# Altium PCB Super_Hornet.PcbDoc (part 1 of 4)
Units mil, origin at the board's own origin, x right, y up, seen from the top; angles counter-clockwise.
Board outline 6000 x 4000 mil, 2 copper layers (Top Layer, Bottom Layer); 166 components, 85 nets, 398 pads, 0 vias.
Unrouted connection lines stored in the file: 74.
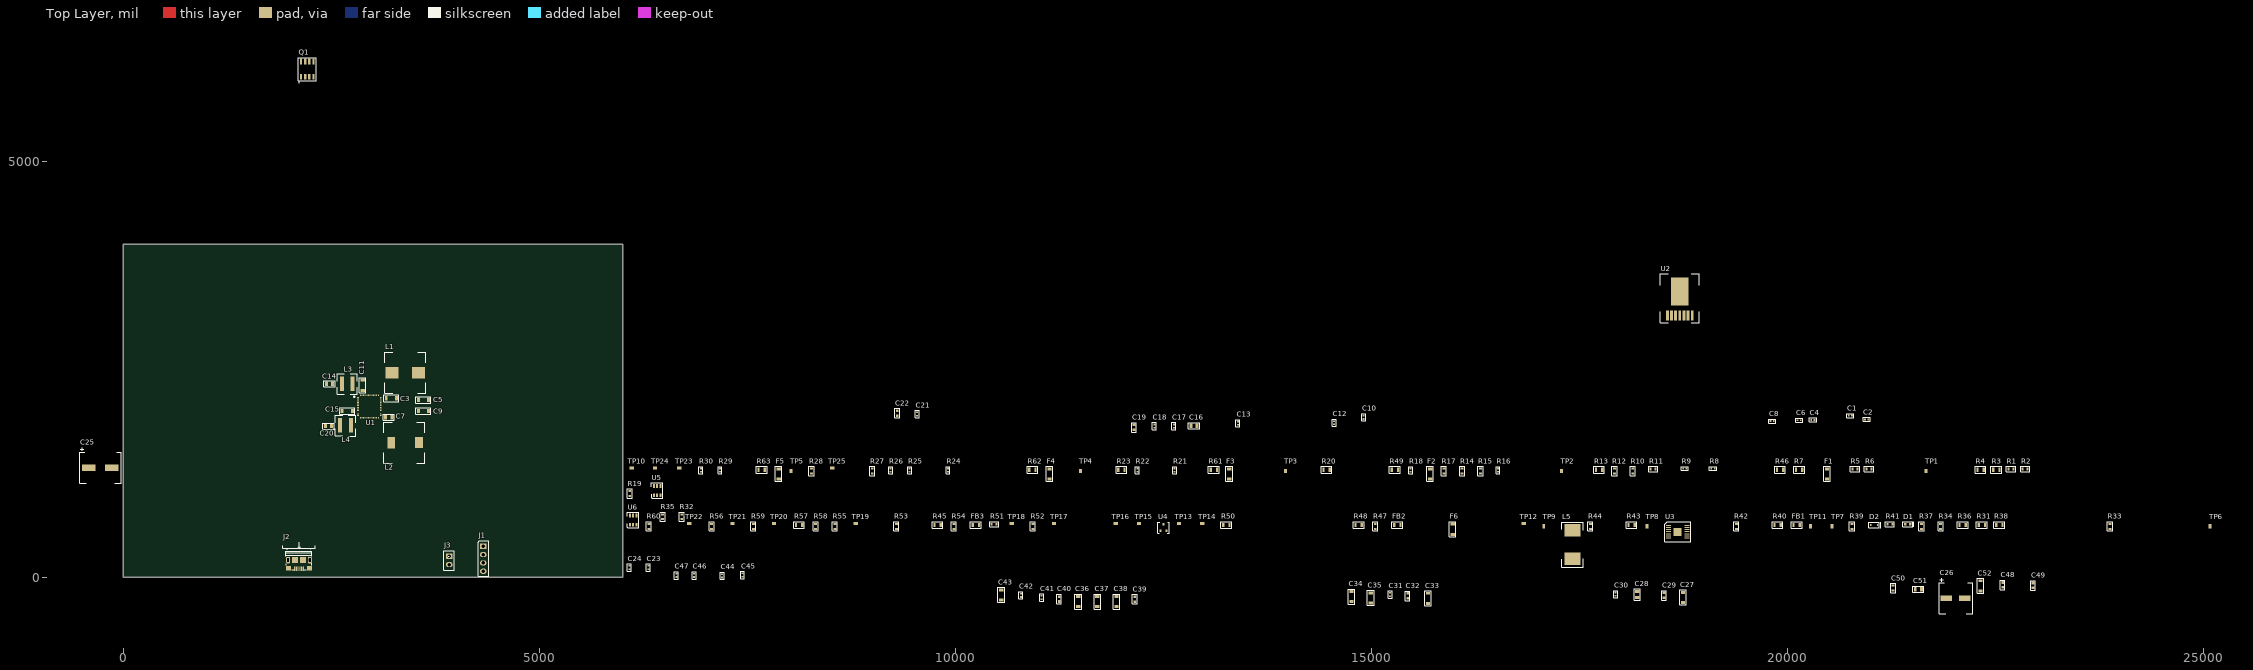
[diagram p0: Top Layer view]
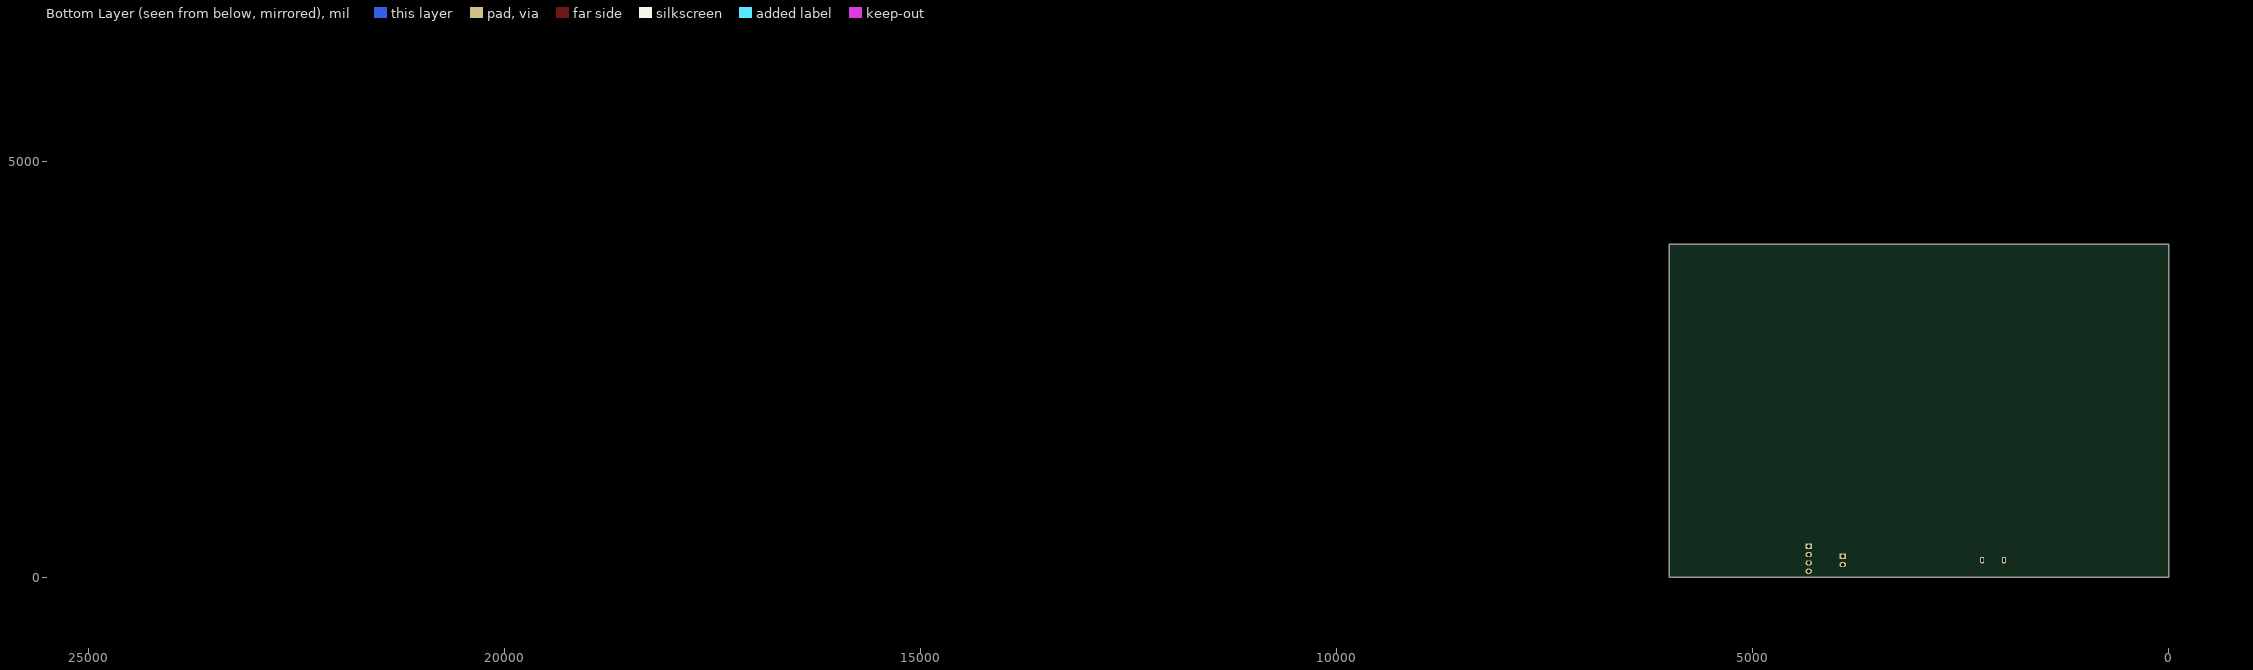
[diagram p1: Bottom Layer view, seen from below]

## Layer stack, top to bottom
Top Solder: solder mask 0.4, Solder Resist, Dk 3.5
Top Layer: signal copper 1.4
Dielectric 1: dielectric 12.6, FR-4, Dk 4.8
Bottom Layer: signal copper 1.4
Bottom Solder: solder mask 0.4, Solder Resist, Dk 3.5

## Board outline
0,0 6000,0 6000,4000 0,4000

## Design rules (kind name [scope] priority, off if disabled: settings)
Clearance [All] p1: gap=3.94 ignorepadtopadclearanceinfootprint=FALSE
PolygonConnect [All] p1: connectstyle=Relief reliefconductorwidth=10 reliefentries=4 polygonreliefangle="90 Angle" airgapwidth=10
RoutingVias [All] p1: holewidth=28 width=50 viastyle="Through Hole" minholewidth=28 minwidth=50 maxholewidth=28 maxwidth=50
SolderMaskExpansion [All] p1: expansion=4
Width [All] p1: maxlimit=10 minlimit=10 preferedwidth=10
30 further rules are at their usual default settings.

## Classes and differential pairs
component class "[02] PMIC_POWER": C1 C2 C3 C4 C5 C6 C7 C8 C9 C10 C11 C12 C13 C14 C15 C16 C17 C18 C19 C20 C21 C22 C23 C24 F1 F2 F3 F4 F5 L1 L2 L3 L4 Q1 R1 R2 R3 R4 R5 R6 R7 R8 R9 R10 R11 R12 R13 R14 R15 R16 R17 R18 R19 R20 R21 R22 R23 R24 R25 R26 R27 R28 R29 R30 R46 R49 R61 R62 R63 TP1 TP2 TP3 TP4 TP5 TP10 TP23 TP24 TP25 U1
component class "[01] SYSTEM_POWER": C25 C26 C27 C28 C29 C30 C31 C32 C33 C34 C35 C36 C37 C38 C39 C40 C41 C42 C43 C44 C45 C46 C47 C48 C49 C50 C51 C52 D1 D2 F6 FB1 FB2 FB3 J1 J2 J3 L5 R31 R32 R33 R34 R35 R36 R37 R38 R39 R40 R41 R42 R43 R44 R45 R47 R48 R50 R51 R52 R53 R54 R55 R56 R57 R58 R59 R60 TP6 TP7 TP8 TP9 TP11 TP12 TP13 TP14 TP15 TP16 TP17 TP18 TP19 TP20 TP21 TP22 U2 U3 U4 U5 U6

## Components (designator, comment, footprint, x,y, rotation, side; value= is the part's Value field where it differs from the comment)
C1 "GCM1555C1H820FA16D" R0402 20755,1940 r0 top
C2 "CC0402KRX7R6BB104" R0402 20950.31,1895 r0 top
C3 "C3216X5R1C106M160AA" C1206 3220,2150 r180 top
C4 "GCM155R71H152KA37D" R0402 20305,1890 r0 top
C5 "12063D226KAT2A" C1206 3605,2130 r0 top
C6 "CC0402KRX7R6BB104" R0402 20139.69,1885 r0 top
C7 "C2012X5R1C475K060AC" C0805_1 3185,1920 r180 top
C8 "GCM155R71H682KA55D" R0402 19815.31,1875 r0 top
C9 "12063D226KAT2A" C1206 3605,1995 r0 top
C10 "GCM155R71H221KA37D" R0402 14905,1920 r90 top
C11 "C3216X5R1C106M160AA" C1206 2875,2305 r270 top
C12 "GCM155R71H152KA37D" R0402 14550,1854.68 r90 top
C13 "CC0402KRX7R6BB104" R0402 13395,1849.68 r90 top
C14 "GRM21BR60J226ME39K" C0805_1 2480,2325 r0 top
C15 "C3216X5R1C106M160AA" C1206 2690,1995 r0 top
C16 "GRM2165C2A182JA01D" C0805_1 12871.34,1820 r0 top
C17 "C0402C101K4GACTU" R0402 12625,1815 r90 top
C18 "CC0402KRX7R6BB104" R0402 12390,1815 r90 top
C19 "C0603C105K8RACTU" C0603_1 12145,1800 r90 top
C20 "GRM21BR60J226ME39K" C0805_1 2460,1815 r180 top
C21 "C0402C181K5RACTU" R0402 9540,1960 r90 top
C22 "C0603C105K8RACTU" C0603_1 9300,1970 r90 top
C23 "CC0402KRX5R5BB105" R0402 6310,115 r90 top
C24 "CC0402KRX5R5BB105" R0402 6080,115 r90 top
C25 "35SVPF39M" "Radial E7" -280,1315 r0 top
C26 "20SVPF120M" "Radial C6" 22020,-255 r0 top
C27 "12063D226KAT2A" C1206 18745,-245 r90 top
C28 "C2012X5R1C475K060AC" C0805_1 18195,-205 r90 top
C29 "GRM188R70J474KA01D" C0603_1 18515,-219.53 r90 top
C30 "CC0402KRX7R6BB104" R0402 17935,-205.32 r90 top
C31 "CC0402KRX7R6BB104" R0402 15225,-210 r90 top
C32 "C0603C105K8RACTU" C0603_1 15435,-225 r90 top
C33 "C3216X5R1C106M160AA" C1206 15680,-255 r90 top
C34 "12063D226KAT2A" C1206 14760,-235 r90 top
C35 "12063D226KAT2A" C1206 14990,-250 r90 top
C36 "C3216X5R1C106M160AA" C1206 11475,-295 r90 top
C37 "C3216X5R1C106M160AA" C1206 11705,-295 r90 top
C38 "C3216X7R1H105K160AE" C1206 11935,-295 r90 top
C39 "GRM188R70J474KA01D" C0603_1 12155,-265 r90 top
C40 "C0603C105K8RACTU" C0603_1 11245,-264.53 r90 top
C41 "CC0402KRX7R6BB104" R0402 11035,-245 r90 top
C42 "CC0402KRX7R6BB104" R0402 10785,-219.69 r90 top
C43 "C3216X5R1C106M160AA" C1206 10550,-215 r90 top
C44 "CC0402KRX7R6BB104" R0402 7195,15.31 r90 top
C45 "CC0402KRX7R6BB104" R0402 7440,25 r90 top
C46 "CC0402KRX7R6BB104" R0402 6860,20.31 r90 top
C47 "CC0402KRX7R6BB104" R0402 6645,20 r90 top
C48 "GRM188R6YA106MA73D" C0603_1 22585,-94.53 r90 top
C49 "GMK107BJ473KAHT" C0603_1 22950,-100.47 r90 top
C50 "C0603C473K8RAC7867" R0603 21270,-130.47 r90 top
C51 "0805YC474KAT2A" C0805_1 21576.54,-145 r0 top
C52 "GRM31CR60J107ME39K" C1206 22320,-105 r90 top
D1 "SML-LXFP0603USBCTR" LED-0603-BLUE 21445,635 r0 top
D2 "MMSZ5231BS-7-F" SOD-323_R1 21040,625 r0 top
F1 "MF-NSML300-2" "C1206 - PTC" 20475,1240 r90 top
F2 "MF-NSML300-2" "C1206 - PTC" 15705,1240 r90 top
F3 "MF-NSML300-2" "C1206 - PTC" 13290,1240 r90 top
F4 "MF-NSML300-2" "C1206 - PTC" 11130,1240 r90 top
F5 "MF-NSML300-2" "C1206 - PTC" 7875,1240 r90 top
F6 "MF-NSML200-2" "C1206 - PTC" 15975,575 r90 top
FB1 "FERRITE BEAD 600 OHM 0805 1LN" R0805 20110,625 r0 top
FB2 "MLZ2012N100LT000" R0805 15310,625 r0 top
FB3 "FERRITE BEAD 600 OHM 0805 1LN" R0805 10245,625 r0 top
J1 "PRPC004SAAN-RC" HDR_MALE_1x4_2.54mm 4325,370 r0 top
J2 "10118193-0001LF" "USB_MICRO - duplicate" 2109.92,152.34 r180 top
J3 "87224-2" HDR_MALE_1x2_2.54mm 3915,250 r0 top
L1 "7443552430" 14.3uH_10_2mmX10_2mmX4mm 3387.48,2455.49 r0 top
L2 "7447798250" 2.5UH_10_2MMX10_2MM 3385,1615 r0 top
L3 "XAL5050-822MEB" 8.2UH_5.28MMX5.28MM 2690,2325 r0 top
L4 "XAL5050-822MEB" 8.2UH_5.28MMX5.28MM 2670.16,1825.49 r0 top
L5 "SPM10040T-2R2M" 2.2UH_10_7MMx10.4MM 17415,390 r90 top
Q1 "IRF8910" 8-SOIC 2210,6105 r0 top
R1 "ERJ-3EKF4641V" R0603 22685,1300 r0 top
R2 "ERJ-3EKF9531V" R0603 22855,1300 r0 top
R3 "CRCW080513K3FKEA" R0805 22510,1290 r0 top
R4 "CRCW080541K2FKEA" R0805 22320,1290 r0 top
R5 "ERJ-3EKF1002V" R0603 20810,1300 r0 top
R6 "ERJ-2GE0R00X" R0603 20980,1300 r0 top
R7 "ERJ-6ENF8251V" R0805 20140,1290 r0 top
R8 "CRCW040222K0FKED" R0402 19105,1305 r0 top
R9 "CRCW040222K0FKED" R0402 18765,1305 r0 top
R10 "ERJ-3EKF4023V" R0603 18140,1275 r90 top
R11 "ERJ-3EKF9531V" R0603 18385,1300 r0 top
R12 "ERJ-3EKF2700V" R0603 17920,1275 r90 top
R13 "RC0805FR-072K87L" R0805 17735,1290 r0 top
R14 "ERJ-3EKF3013V" R0603 16090,1275 r90 top
R15 "ERJ-3EKF1002V" R0603 16310,1275 r90 top
R16 "ERJ-2RKF7322X" R0402 16520,1285 r90 top
R17 "ERJ-3EKF1002V" R0603 15870,1275 r90 top
R18 "ERJ-2RKF1372X" R0402 15470,1285 r90 top
R19 "ERJ-3LWFR010V" R0603 6085,1005 r90 top
R20 "ERJ-6ENF7681V" R0805 14460,1290 r0 top
R21 "ERJ-2RKF3572X" R0402 12635,1285 r90 top
R22 "CRCW040228K7FKED" R0402 12185,1285 r90 top
R23 "ERJ-6ENF8451V" R0805 11995,1290 r0 top
R24 "ERJ-2RKF6812X" R0402 9910,1285 r90 top
R25 "ERJ-2RKF1962X" R0402 9450,1285 r90 top
R26 "CRCW040228K7FKED" R0402 9220,1285 r90 top
R27 "ERJ-2GE0R00X" R0603 9000,1275 r90 top
R28 "ERJ-2GE0R00X" R0603 8270,1275 r90 top
R29 "ERJ-2RKF6042X" R0402 7170,1285 r90 top
R30 "ERJ-2RKF2322X" R0402 6940,1285 r90 top
R31 "ERJ-6GEY0R00V" R0805 22335,625 r0 top
R32 "ERJ-3EKF4222V" R0603 6710,725 r90 top
R33 "ERA-3AEB102V" R0603 23875,610 r90 top
R34 "ERJ3EKF1000V" R0603 21840,610 r90 top
R35 "ERJ-3EKF1272V" R0603 6480,725 r90 top
R36 "ERJ-6ENF1071V" R0805 22105,625 r0 top
R37 "RES 0.005 OHM 1% 1/4W 0603" R0603 21610,610 r90 top
R38 "ERJ-6ENF5621V" R0805 22545,625 r0 top
R39 "ERJ-3EKF2212V" R0603 20775,610 r90 top
R40 "ERJ-6GEY0R00V" R0805 19880,625 r0 top
R41 "ERJ-3EKF1501V" R0603 21230,635 r0 top
R42 "ERJ-3EKF4992V" R0603 19385,610 r90 top
R43 "ERJ-6GEY0R00V" R0805 18125,625 r0 top
R44 "ERJ-3EKF1002V" R0603 17630,610 r90 top
R45 "ERJ-6GEY0R00V" R0805 9785,625 r0 top
R46 "ERJ-6GEY0R00V" R0805 19910,1290 r0 top
R47 "ERJ3EKF1003V" R0603 15045,610 r90 top
R48 "ERJ-6GEY0R00V" R0805 14845,625 r0 top
R49 "ERJ-6GEY0R00V" R0805 15280,1290 r0 top
R50 "ERJ-6GEY0R00V" R0805 13255,625 r0 top
R51 "ERJ-3EKF4992V" R0603 10465,635 r0 top
R52 "ERJ-3EKF1503V" R0603 10930,610 r90 top
R53 "ERJ-3EKF1002V" R0603 9290,610 r90 top
R54 "ERJ-3EKF1002V" R0603 9980,610 r90 top
R55 "ERJ-3EKF6341V" R0603 8550,610 r90 top
R56 "ERJ-3EKF6341V" R0603 7070,610 r90 top
R57 "ERJ-6ENF8251V" R0805 8120,625 r0 top
R58 "ERJ-3EKF9311V" R0603 8320,610 r90 top
R59 "ERJ3EKF1000V" R0603 7570,610 r90 top
R60 "ERJ3EKF1000V" R0603 6315,610 r90 top
R61 "ERJ-6GEY0R00V" R0805 13105,1290 r0 top
R62 "ERJ-6GEY0R00V" R0805 10925,1290 r0 top
R63 "ERJ-6GEY0R00V" R0805 7670,1290 r0 top
TP1 "5017" TEST_POINT 21665,1275 r0 top
TP2 "5017" TEST_POINT 17285,1275 r0 top
TP3 "5017" TEST_POINT 13965,1275 r0 top
TP4 "5017" TEST_POINT 11500,1275 r0 top
TP5 "5017" TEST_POINT 8025,1275 r0 top
TP6 "5017" TEST_POINT 25080,610 r0 top
TP7 "5017" TEST_POINT 20535,610 r0 top
TP8 "5017" TEST_POINT 18310,610 r0 top
TP9 "5017" TEST_POINT 17070,610 r0 top
TP10 "5017" TEST_POINT 6110,1310 r90 top
TP11 "5017" TEST_POINT 20275,610 r0 top
TP12 "5017" TEST_POINT 16830,645 r90 top
TP13 "5017" TEST_POINT 12685,645 r90 top
TP14 "5017" TEST_POINT 12965,645 r90 top
TP15 "5017" TEST_POINT 12205,645 r90 top
TP16 "5017" TEST_POINT 11925,645 r90 top
TP17 "5017" TEST_POINT 11185,645 r90 top
TP18 "5017" TEST_POINT 10675,645 r90 top
TP19 "5017" TEST_POINT 8800,645 r90 top
TP20 "5017" TEST_POINT 7820,645 r90 top
TP21 "5017" TEST_POINT 7320,645 r90 top
TP22 "5017" TEST_POINT 6800,645 r90 top
TP23 "5017" TEST_POINT 6680,1310 r90 top
TP24 "5017" TEST_POINT 6390,1310 r90 top
TP25 "5017" TEST_POINT 8520,1310 r90 top
U1 "ADP5052" 48-LFSCP 2955,2050 r0 top
U2 "LMZ22005TZX/NOPB" TO-PMOD-7 18705,3290 r0 top
U3 "TPS54325PWPR" 14-HTSSOP 17735,575 r0 top
U4 "REF3012AIDBZR" SOT-23-3 12500,595 r0 top
U5 "INA199A1DCKR" SOT-363 6415,1040.12 r0 top
U6 "INA199A1DCKR" SOT-363 6125,685 r0 top

## Footprints (in the part's own frame and the unit in brackets; to place one, negate y for a bottom-side part, rotate by r counter-clockwise, add the part's x,y. Pads: shape width x height; smd on the part's side, far side on the other; paste and mask are expansions set on the pad)
2.2UH_10_7MMx10.4MM [mm]
  rect 3.8x4.8 smd: 1(-4.35,0) 2(4.35,0)
  silkscreen extent -6.85,-3.24 6.9,3.3, body extent -3.6,-3.2 3.6,3.2, height 3.01
2.5UH_10_2MMX10_2MM [mm]
  rect 2.4x3.4 smd: 1(-4.2,-0.012) 2(4.2,0.012)
  silkscreen extent -6.45,-6.25 6.05,6.25, body extent -5.1,-5.1 5.1,5.1, height 6.35
8-SOIC [mm]
  rect 0.72x1.78 smd: 1(-1.905,-2.34) 2(-0.635,-2.332) 3(0.635,-2.332) 4(1.905,-2.332) 5(1.905,2.34) 6(0.635,2.34) 7(-0.635,2.34) 8(-1.905,2.34)
  silkscreen extent -2.75,-4.1 2.75,3.5, body extent -2.45,-3 2.45,3, height 1.75
8.2UH_5.28MMX5.28MM [mm]
  rect 1.18x4.47 smd: 1(-1.655,-0.012) 2(1.655,0.013)
  silkscreen extent -3.13,-3.3 3.08,3, body extent -2.74,-2.99 2.74,2.69, height 3.11
14-HTSSOP [mm]
  rect 1.55x0.25 smd: 1(21.2,1.2) 2(21.2,0.55) 3(21.2,-0.1) 4(21.2,-0.75) 5(21.2,-1.4) 6(21.2,-2.05) 7(21.2,-2.7) 8(26.8,-2.7) 9(26.8,-2.05) 10(26.8,-1.4) 11(26.8,-0.75) 12(26.8,-0.1) 13(26.8,0.55) 14(26.8,1.2)
  rect 2.31x2.46 smd: 15(23.95,-0.8)
  silkscreen extent 20,-3.75 28,2.25, body extent 20.7,-3.3 27.3,1.8, height 1.7
14.3uH_10_2mmX10_2mmX4mm [mm]
  rect 4x3.5 smd: 1(-4,-0.012) 2(4,0.013)
  silkscreen extent -6.25,-6.25 6.25,6.25, body extent -5.25,-5.1 5.25,5.1, height 4
48-LFSCP [mm]
  rect 0.5x0.3 smd: 1(-3.45,2.75) 2(-3.45,2.25) 3(-3.45,1.75) 4(-3.45,1.25) 5(-3.45,0.75) 6(-3.45,0.25) 7(-3.45,-0.25) 8(-3.45,-0.75) 9(-3.45,-1.25) 10(-3.45,-1.75) 11(-3.45,-2.25) 12(-3.45,-2.75) 25(3.475,-2.75) 26(3.475,-2.25) 27(3.475,-1.75) 28(3.475,-1.25) 29(3.475,-0.75) 30(3.475,-0.25) 31(3.475,0.25) 32(3.475,0.75) 33(3.475,1.25) 34(3.475,1.75) 35(3.475,2.25) 36(3.475,2.75)
  rect 0.3x0.5 smd: 13(-2.75,-3.45) 14(-2.25,-3.45) 15(-1.75,-3.45) 16(-1.25,-3.45) 17(-0.75,-3.45) 18(-0.25,-3.45) 19(0.25,-3.45) 20(0.75,-3.45) 21(1.25,-3.45) 22(1.75,-3.45) 23(2.25,-3.45) 24(2.75,-3.45) 37(2.75,3.425) 38(2.25,3.425) 39(1.75,3.425) 40(1.25,3.425) 41(0.75,3.425) 42(0.25,3.425) 43(-0.25,3.425) 44(-0.75,3.425) 45(-1.25,3.425) 46(-1.75,3.425) 47(-2.25,3.425) 48(-2.75,3.425)
  silkscreen extent -4.81,2.76 -4.43,3.14, body extent -3.55,-3.55 3.55,3.55, height 0.78
C0603_1 [mm]
  rect 0.8x0.8 smd: 1(-0.75,0) 2(0.75,0)
  silkscreen extent -1.45,-0.7 1.45,0.7, body extent -0.8,-0.4 0.8,0.44, height 0.81
C0805_1 [mm]
  rect 0.9x1.3 smd: 1(-1.05,0) 2(0.85,0)
  silkscreen extent -1.8,-0.9 1.6,0.9, body extent -1.1,-0.6 0.9,0.6, height 0.71
C1206 [mm]
  rect 0.9x1.3 smd: 1(-1.55,0) 2(1.55,0)
  silkscreen extent -2.29,-1.02 2.29,1.02, body extent -1.6,-0.8 1.6,0.8, height 1
"C1206 - PTC" [mm]
  rect 0.9x1.3 smd: 1(-1.55,0) 2(1.55,0)
  silkscreen extent -2.29,-1.02 2.29,1.02, body extent -1.7,-0.85 1.7,0.85, height 0.81
HDR_MALE_1x2_2.54mm [mm]
  rect 2x1.6 hole 1.1: 1(0,0)
  oval 2x1.6 hole 1.1: 2(0,-2.54)
  silkscreen extent -1.6,-4.2 1.6,1.7, body extent -1.27,-3.81 1.27,1.27, height 8.89
HDR_MALE_1x4_2.54mm [mm]
  rect 2x1.6 hole 1.1: 1(0,0)
  oval 2x1.6 hole 1.1: 2(0,-2.54) 3(0,-5.08) 4(0,-7.62)
  silkscreen extent -1.6,-9.2 1.7,1.7, body extent -1.2,-8.88 1.34,1.28, height 5.6
LED-0603-BLUE [mm]
  rect 0.75x0.7 smd: 1(-0.75,0) 2(0.75,0)
  silkscreen extent -1.5,-0.7 1.9,0.7, body extent -0.8,-0.4 0.8,0.4, height 0.6
R0402 [mm]
  rect 0.5x0.6 smd: 1(-0.5,0) 2(0.5,0)
  silkscreen extent -1.1,-0.6 1.1,0.6, body extent -0.5,-0.25 0.5,0.25, height 0.36
R0603 [mm]
  rect 0.6x0.9 smd: 1(-0.75,0) 2(0.75,0)
  silkscreen extent -1.4,-0.79 1.4,0.79, body extent -0.77,-0.41 0.83,0.43, height 0.81
R0805 [mm]
  rect 0.7x1.3 smd: 1(-0.95,0) 2(0.95,0)
  silkscreen extent -1.65,-1.02 1.65,1.02, body extent -1,-0.6 1,0.6, height 0.71
"Radial C6" [mm]
  rect 3.5x1.6 smd: 1(-2.812,0) 2(2.813,0)
  silkscreen extent -5.04,-4.75 5.21,6.1, body extent -3.75,-3.4 3.75,3.4, height 6.05
"Radial E7" [mm]
  rect 4.15x2 smd: 1(-3.525,0) 2(3.525,0)
  silkscreen extent -6.25,-4.75 6.5,6.1, body extent -4.6,-4.25 4.6,4.25, height 7.06
SOD-323_R1 [mm]
  rect 0.45x0.6 smd: 1(-1.05,0) 2(1.05,0)
  silkscreen extent -1.6,-0.9 2,0.92, body extent -1.35,-0.68 1.25,0.67, height 1.12
SOT-23-3 [mm]
  rect 0.6x0.7 smd: 1(-0.95,-1) 2(0.95,-1) 3(0,1)
  silkscreen extent -1.8,-1.8 1.8,1.7, body extent -1.5,-1.25 1.5,1.25, height 1.11
SOT-363 [mm]
  rect 0.6x1.1 smd: 1(-1,-1.4) 2(0,-1.4) 3(1,-1.4) 4(-1,1.4) 5(0,1.4) 6(1,1.4)
  silkscreen extent -1.78,-2.4 1.75,2.35, body extent -1.5,-1.5 1.5,1.5, height 1.31
TEST_POINT [mm]
  rect 0.9x1.3 smd: 1(0,0)
  body extent -0.5,-1.45 0.5,1.45, height 2.01
TO-PMOD-7 [mm]
  rect 0.89x3.06 smd: 1(-3.81,-3.652) 2(-2.54,-3.652) 3(-1.27,-3.652) 4(0,-3.652) 5(1.27,-3.652) 6(2.54,-3.652) 7(3.81,-3.652)
  rect 5.35x8.54 smd: 8(0,3.652)
  silkscreen extent -6,-6 6,9, body extent -5.22,-3.56 5.2,8.4, height 4.74
"USB_MICRO - duplicate" [mm]
  rect 0.4x1.35 smd mask+0.05: 1(-1.3,1.338) 2(-0.65,1.338) 3(0,1.338) 4(0.65,1.338) 5(1.3,1.338)
  rect 1.6x1.4 smd mask+0.05: 6(-3.2,1.112)
  rect 1.6x1.4 smd paste+0 mask+0.05: 7(3.2,1.112)
  rrect50% 1.2x2 hole 0.5 slot 1.2 at 90 deg: 8(-3.3,-1.338) 9(3.3,-1.338)
  rect 1.9x1.9 smd mask+0.05: 10(-1.2,-1.338) 11(1.2,-1.338)
  silkscreen extent -5.03,-6.83 5.03,1.64, body extent -3.93,-4.06 3.93,1.6, height 2.87

## Part data
C1: "CAP CER 82PF 50V C0G/NP0 0402", Capacitance=82pF, Manufacturer=Murata, Operating Temperature="-55°C ~ 125°C", Package / Case="0402 (1005 Metric)", Ratings=AEC-Q200, Supplier Part Number 1=490-16436-1-ND, Temperature Coefficient="C0G, NP0", Tolerance=±1%, Voltage - Rated=50V, Applications=Automotive, Categories=Capacitors, ComponentLink1Description=http://search.murata.co.jp/Ceramy/image/img/A01X/G101/ENG/GCM1555C1H820FA16-01.pdf?src-supplier=Digi-Key, ComponentLink1URL=http://search.murata.co.jp/Ceramy/image/img/A01X/G101/ENG/GCM1555C1H820FA16-01.pdf?src-supplier=Digi-Key, Failure Rate=-, Features=-, Height - Seated (Max)=-, Lead Spacing=-, Lead Style=-, Manufacturer Part Number=GCM1555C1H820FA16D, Mounting Type="Surface Mount, MLCC", Packaging=Digi-Reel®, Part Status=Active, Pricing 1="1=0.13, 10=0.095, 100=0.0445, 500=0.0312, 1000=0.0258, 2500=0.024, 5000=0.022 (USD)", Series=GCM, Size / Dimension="0.039 L x 0.020 W (1.00mm x 0.50mm)", Stock 1=81409, Supplier 1=Digi-Key, Thickness (Max)="0.022 (0.55mm)"
C2 C6 C13 C18 C30 C31 C41: "0402 0.1 uF 10 V ±10 % Tolerance X7R SMT Multilayer Ceramic Capacitor", Capacitance=0.1µF, Manufacturer=Yageo, Operating Temperature="-55°C ~ 125°C", Package / Case="0402 (1005 Metric)", Ratings=-, Standard Package=1, Supplier Part Number 1=311-1345-1-ND, Temperature Coefficient=X7R, Tolerance=±10%, Voltage - Rated=10V, Applications="General Purpose", Catalog Drawings=CC_0402, Category=Capacitors, ComponentLink1Description=http://www.mouser.com/ds/2/447/Yageo_UPY-GP_NP0_16V-to-50V_9-358835.pdf?src-supplier=Mouser, ComponentLink1URL=http://www.mouser.com/ds/2/447/Yageo_UPY-GP_NP0_16V-to-50V_9-358835.pdf?src-supplier=Mouser, ComponentLink2Description=https://www.verical.com/server-webapp/html/getDatasheet?partID=317655&src-supplier=Verical, ComponentLink2URL=https://www.verical.com/server-webapp/html/getDatasheet?partID=317655&src-supplier=Verical, ComponentLink3Description=http://www.farnell.com/datasheets/2167236.pdf?src-supplier=Element14, ComponentLink3URL=http://www.farnell.com/datasheets/2167236.pdf?src-supplier=Element14, ComponentLink4Description=http://www.yageo.com/documents/recent/UPY-GPHC_X7R_6.3V-to-50V_18.pdf?src-supplier=Digi-Key, ComponentLink4URL=http://www.yageo.com/documents/recent/UPY-GPHC_X7R_6.3V-to-50V_18.pdf?src-supplier=Digi-Key, ComponentLink5Description=http://www.yageo.com/documents/recent/UPY-GPHC_X7R_6.3V-to-50V_8.pdf?src-supplier=Avnet+Europe, ComponentLink5URL=http://www.yageo.com/documents/recent/UPY-GPHC_X7R_6.3V-to-50V_8.pdf?src-supplier=Avnet+Europe, Family="Ceramic Capacitors", Featured Product="Commodity Multilayer Ceramic Capacitors – CC Series", Features=-, Height - Seated (Max)=-, Lead Spacing=-, Lead Style=-, Manufacturer Part Number=CC0402KRX7R6BB104, Mounting Type="Surface Mount, MLCC", Online Catalog="CC Series", Other Names=311-1345-6, Packaging=Digi-Reel®, Pricing 1="1=0.1, 10=0.03, 100=0.0134, 500=0.0096, 1000=0.0075, 2500=0.0069, 5000=0.0063 (USD)", Product Training Modules="Multilayer Ceramic Capacitors", Series=CC, Size / Dimension="0.039\" L x 0.020\" W (1.00mm x 0.50mm)", Stock 1=1324566, Supplier 1=Digi-Key, Thickness (Max)="0.022\" (0.55mm)"
C3 C11 C15 C33 C36 C37 C43: "CAP CER 10UF 16V X5R 1206", Capacitance=10µF, Manufacturer=TDK, Operating Temperature="-55°C ~ 85°C", Package / Case="1206 (3216 Metric)", PCN Part Number="MLCC Part Number Change 30/Nov/2012", Ratings=-, Standard Package=1, Supplier Part Number 1=445-1426-1-ND, Temperature Coefficient=X5R, Tolerance=±20%, Voltage - Rated=16V, Applications="General Purpose", Catalog Drawings="C SERIES_1206_1.8", Category=Capacitors, ComponentLink1Description=http://www.farnell.com/datasheets/1359284.pdf?src-supplier=Element14, ComponentLink1URL=http://www.farnell.com/datasheets/1359284.pdf?src-supplier=Element14, ComponentLink2Description=http://www.mouser.com/ds/2/400/lcc_commercial_general_en-837201.pdf?src-supplier=Mouser, ComponentLink2URL=http://www.mouser.com/ds/2/400/lcc_commercial_general_en-837201.pdf?src-supplier=Mouser, ComponentLink3Description=http://www.farnell.com/datasheets/1796654.pdf?src-supplier=Element14, ComponentLink3URL=http://www.farnell.com/datasheets/1796654.pdf?src-supplier=Element14, ComponentLink4Description=https://product.tdk.com/info/en/documents/chara_sheet/C3216X5R1C106M160AA.pdf?src-supplier=Digi-Key, ComponentLink4URL=https://product.tdk.com/info/en/documents/chara_sheet/C3216X5R1C106M160AA.pdf?src-supplier=Digi-Key, Family="Ceramic Capacitors", Features=-, Height - Seated (Max)=-, Lead Spacing=-, Lead Style=-, Manufacturer Part Number=C3216X5R1C106M160AA, Mounting Type="Surface Mount, MLCC", Online Catalog="C Series, General Purpose", Other Names=445-1426-6, Packaging=Digi-Reel®, Pricing 1="1=0.33, 10=0.228, 100=0.129, 500=0.0911, 1000=0.0797 (USD)", Product Training Modules="High Capacitance Replacement C Series General Applications SEAT, CCV, and TVCL Design Tools Guide to Replacing an Electrolytic Capacitor with an MLCC", RoHS Information="RoHS Certificate-MLCC", Series=C, Size / Dimension="0.126\" L x 0.063\" W (3.20mm x 1.60mm)", Stock 1=163411, Supplier 1=Digi-Key, Thickness (Max)="0.071\" (1.80mm)"
C4 C12: "CAP CER 1500PF 50V X7R 0402", Capacitance=1500pF, Manufacturer=Murata, Operating Temperature="-55°C ~ 125°C", Package / Case="0402 (1005 Metric)", Ratings=AEC-Q200, Standard Package=1, Supplier Part Number 1=490-8000-1-ND, Temperature Coefficient=X7R, Tolerance=±10%, Voltage - Rated=50V, Applications=Automotive, Catalog Drawings="GCM Series_0402", Category=Capacitors, ComponentLink1Description=http://psearch.murata.com/capacitor/product/GCM155R71H152KA37%23.pdf?src-supplier=Avnet+Europe, ComponentLink1URL=http://psearch.murata.com/capacitor/product/GCM155R71H152KA37%23.pdf?src-supplier=Avnet+Europe, ComponentLink2Description=http://www.murata.com/~/media/webrenewal/support/library/catalog/products/capacitor/mlcc/c03e.ashx?src-supplier=Digi-Key, ComponentLink2URL=http://www.murata.com/~/media/webrenewal/support/library/catalog/products/capacitor/mlcc/c03e.ashx?src-supplier=Digi-Key, ComponentLink3Description=http://psearch.murata.com/capacitor/product/GCM155R71H152KA37%23.pdf?src-supplier=Avnet, ComponentLink3URL=http://psearch.murata.com/capacitor/product/GCM155R71H152KA37%23.pdf?src-supplier=Avnet, ComponentLink4Description=http://search.murata.co.jp/Ceramy/image/img/A01X/partnumbering_e_02.pdf?src-supplier=Digi-Key, ComponentLink4URL=http://search.murata.co.jp/Ceramy/image/img/A01X/partnumbering_e_02.pdf?src-supplier=Digi-Key, ComponentLink5Description=http://search.murata.co.jp/Ceramy/image/img/w_hinm/S0717E.pdf?src-supplier=Future+Electronics, ComponentLink5URL=http://search.murata.co.jp/Ceramy/image/img/w_hinm/S0717E.pdf?src-supplier=Future+Electronics, ComponentLink6Description=https://www.verical.com/server-webapp/html/getDatasheet?partID=724076&src-supplier=Verical, ComponentLink6URL=https://www.verical.com/server-webapp/html/getDatasheet?partID=724076&src-supplier=Verical, Dynamic Catalog="GCM Series", Family="Ceramic Capacitors", Featured Product="GCM Series Capacitors", Features=-, Height - Seated (Max)=-, Lead Spacing=-, Lead Style=-, Manufacturer Part Number=GCM155R71H152KA37D, Mounting Type="Surface Mount, MLCC", Other Names=490-8000-6, Packaging=Digi-Reel®, Pricing 1="1=0.1, 10=0.045, 100=0.0202, 500=0.0144, 1000=0.0113, 2500=0.0103, 5000=0.0095 (USD)", Series=GCM, Size / Dimension="0.039\" L x 0.020\" W (1.00mm x 0.50mm)", Stock 1=36934, Supplier 1=Digi-Key, Thickness (Max)="0.022\" (0.55mm)"
C5 C9: "1206 25 V 22 uF X5R ±10% Tolerance SMT Multilayer Ceramic Capacitor", Capacitance="22 µF", Case Size/Dimension=1206, Dielectric=X5R, Manufacturer="Kyocera AVX", Rated Voltage="25 V", Supplier Part Number 1=478-9946-1-ND, Tolerance (%)="±10 %", ComponentLink1Description=http://www.avx.com/docs/Catalogs/cx5r.pdf?src-supplier=Future+Electronics, ComponentLink1URL=http://www.avx.com/docs/Catalogs/cx5r.pdf?src-supplier=Future+Electronics, Manufacturer Part Number=12063D226KAT2A, Pricing 1="1=1.15, 10=0.909, 100=0.6814, 500=0.5148, 1000=0.4543 (USD)", Stock 1=100747, Supplier 1=Digi-Key
C7 C28: "CAP CER 4.7UF 16V X5R 0805", Capacitance=4.7µF, Manufacturer=TDK, Operating Temperature="-55°C ~ 85°C", Package / Case="0805 (2012 Metric)", Standard Package=1, Supplier Part Number 1=445-14381-1-ND, Temperature Coefficient=X5R, Tolerance=±10%, Voltage - Rated=16V, Applications="General Purpose", Category=Capacitors, ComponentLink1Description=https://product.tdk.com/en/products/common/pdf/mlcc_partnumber_description.pdf?src-supplier=Digi-Key, ComponentLink1URL=https://product.tdk.com/en/products/common/pdf/mlcc_partnumber_description.pdf?src-supplier=Digi-Key, ComponentLink2Description=https://product.tdk.com/info/en/catalog/spec/mlccspec_commercial_general_midvoltage_en.pdf?src-supplier=Digi-Key, ComponentLink2URL=https://product.tdk.com/info/en/catalog/spec/mlccspec_commercial_general_midvoltage_en.pdf?src-supplier=Digi-Key, EDA / CAD Models="Download from Accelerated Designs", Family="Ceramic Capacitors", Manufacturer Part Number=C2012X5R1C475K060AC, Mounting Type="Surface Mount, MLCC", Online Catalog="C Series, General Purpose", Other Names=445-14381-6, Packaging=Digi-Reel®, Pricing 1="1=0.5, 10=0.348, 100=0.2087, 500=0.1565, 1000=0.1322 (USD)", Product Training Modules="C Series General Applications SEAT, CCV, and TVCL Design Tools Guide to Replacing an Electrolytic Capacitor with an MLCC", RoHS Information="RoHS Certificate-MLCC", Series=C, Size / Dimension="0.079\" L x 0.049\" W (2.00mm x 1.25mm)", Stock 1=30385, Supplier 1=Digi-Key, Thickness (Max)="0.030\" (0.75mm)"
C8: "CAP CER 6800PF 50V X7R 0402", Capacitance Value="0.0068 uF", Dielectric=X7R, Manufacturer=Murata, Operating Temperature="-55 to 125 °C", Package/Case=0402, Supplier Part Number 1=490-11152-1-ND, Tolerance="10 %", Voltage="50 Vdc", Category="Capacitor Ceramic Multilayer", ComponentLink1Description=http://search.murata.co.jp/Ceramy/image/img/w_hinm/S0717E.pdf?src-supplier=Digi-Key, ComponentLink1URL=http://search.murata.co.jp/Ceramy/image/img/w_hinm/S0717E.pdf?src-supplier=Digi-Key, Construction=Flat, Manufacturer Part Number=GCM155R71H682KA55D, Mounting="Surface Mount", Packaging="Tape & Reel", Pricing 1="1=0.1, 10=0.05, 100=0.0221, 500=0.0158, 1000=0.0124, 2500=0.0113, 5000=0.0104 (USD)", Product Depth="0.5 mm", Product Height="0.5 mm", Product Length="1 mm", Rad Hard=No, Stock 1=79110, Supplier 1=Digi-Key
C10: "CAP CER 220PF 50V X7R 0402", Capacitance Value="220 pF", Dielectric=X7R, Manufacturer=Murata, Operating Temperature="-55 to 125 °C", Package/Case=0402, Supplier Part Number 1=490-4912-1-ND, Tolerance="10 %", Voltage="50 Vdc", Category="Capacitor Ceramic Multilayer", ComponentLink1Description=http://psearch.murata.com/capacitor/product/GCM155R71H221KA37%23.pdf?src-supplier=Avnet+Europe, ComponentLink1URL=http://psearch.murata.com/capacitor/product/GCM155R71H221KA37%23.pdf?src-supplier=Avnet+Europe, ComponentLink2Description=http://search.murata.co.jp/Ceramy/image/img/A01X/partnumbering_e_02.pdf?src-supplier=Digi-Key, ComponentLink2URL=http://search.murata.co.jp/Ceramy/image/img/A01X/partnumbering_e_02.pdf?src-supplier=Digi-Key, ComponentLink3Description=https://www.murata.com/~/media/webrenewal/support/library/catalog/products/capacitor/mlcc/c03e.ashx?src-supplier=Avnet, ComponentLink3URL=https://www.murata.com/~/media/webrenewal/support/library/catalog/products/capacitor/mlcc/c03e.ashx?src-supplier=Avnet, Construction=Flat, Manufacturer Part Number=GCM155R71H221KA37D, Mounting="Surface Mount", Packaging="Tape & Reel", Pricing 1="1=0.1, 10=0.054, 100=0.0241, 500=0.0172, 1000=0.0135, 2500=0.0123, 5000=0.0113 (USD)", Product Depth="0.5 mm", Product Height="0.5 mm", Product Length="1 mm", Rad Hard=No, Stock 1=139362, Supplier 1=Digi-Key
C14 C20: "Cap Ceramic 22uF 6.3V X5R 20% SMD 0805 85C Embossed T/R", Capacitance Value="22 uF", Dielectric=X5R, Manufacturer=Murata, Operating Temperature="-55 to 85 °C", Package/Case=0805, Supplier Part Number 1=490-6471-1-ND, Tolerance="20 %", Voltage="6.3 Vdc", Category="Capacitor Ceramic Multilayer", ComponentLink1Description=http://search.murata.co.jp/Ceramy/image/img/A01X/G101/ENG/GRM21BR60J226ME39-01.pdf?src-supplier=Digi-Key, ComponentLink1URL=http://search.murata.co.jp/Ceramy/image/img/A01X/G101/ENG/GRM21BR60J226ME39-01.pdf?src-supplier=Digi-Key, ComponentLink2Description=http://www.mouser.com/ds/2/281/c02e-2905.pdf?src-supplier=Mouser, ComponentLink2URL=http://www.mouser.com/ds/2/281/c02e-2905.pdf?src-supplier=Mouser, ComponentLink3Description=http://psearch.murata.com/capacitor/product/GRM21BR60J226ME39%23.pdf?src-supplier=Avnet, ComponentLink3URL=http://psearch.murata.com/capacitor/product/GRM21BR60J226ME39%23.pdf?src-supplier=Avnet, Construction=Flat, Manufacturer Part Number=GRM21BR60J226ME39K, Mounting="Surface Mount", Packaging="Tape & Reel", Pricing 1="1=0.5, 10=0.347, 100=0.2082, 500=0.1561, 1000=0.1319, 2500=0.1249, 5000=0.118 (USD)", Product Depth="1.25 mm", Product Height="1.25 mm", Product Length="2 mm", Rad Hard=No, Stock 1=32530, Supplier 1=Digi-Key
C16: "CAP CER 1800PF 100V C0G/NP0 0805", Capacitance=1800pF, Manufacturer=Murata, Operating Temperature="-55°C ~ 125°C", Package / Case="0805 (2012 Metric)", Ratings=-, Standard Package=4,000, Supplier Part Number 1=490-13368-1-ND, Temperature Coefficient="C0G, NP0", Tolerance=±5%, Voltage - Rated=100V, Applications="General Purpose", Catalog Drawings="GRM Series_0805_0.6", Category=Capacitors, ComponentLink1Description=http://search.murata.co.jp/Ceramy/image/img/A01X/partnumbering_e_01.pdf?src-supplier=Digi-Key, ComponentLink1URL=http://search.murata.co.jp/Ceramy/image/img/A01X/partnumbering_e_01.pdf?src-supplier=Digi-Key, ComponentLink2Description=http://psearch.murata.com/capacitor/product/GRM2165C2A182JA01%23.pdf?src-supplier=Avnet, ComponentLink2URL=http://psearch.murata.com/capacitor/product/GRM2165C2A182JA01%23.pdf?src-supplier=Avnet, ComponentLink3Description=http://www.mouser.com/ds/2/281/c02e-2905.pdf?src-supplier=Mouser, ComponentLink3URL=http://www.mouser.com/ds/2/281/c02e-2905.pdf?src-supplier=Mouser, Family="Ceramic Capacitors", Features=-, Height - Seated (Max)=-, Lead Spacing=-, Lead Style=-, Manufacturer Part Number=GRM2165C2A182JA01D, Mounting Type="Surface Mount, MLCC", Packaging="Tape & Reel (TR)", Pricing 1="1=0.19, 10=0.128, 100=0.0649, 500=0.0444, 1000=0.0393 (USD)", Series=GRM, Size / Dimension="0.079\" L x 0.049\" W (2.00mm x 1.25mm)", Stock 1=2422, Supplier 1=Digi-Key, Thickness (Max)="0.028\" (0.70mm)"
C17: "CAP CER 100PF 16V C0G/NP0 0402", Capacitance="100 pF", Capacitance - nF="0.1 nF", Case Code - in=0402, Case Code - mm=1005, Case Height="0.5 mm", Case Length="1 mm", Dielectric="C0G (NP0)", Manufacturer=KEMET, Maximum Operating Temperature="+ 125 C", Minimum Operating Temperature="- 55 C", Operating Temperature Range="- 55 C to + 125 C", Package / Case="0402 (1005 metric)", Supplier Part Number 1=399-7749-1-ND, Temperature Coefficient / Code="+/- 30 PPM / C", Tolerance="10 %", Voltage Rating="16 V", Brand=Kemet, Case Width="0.5 mm", Class="Class 1", ComponentLink1Description=http://www.mouser.com/ds/2/212/KEM_C1003_C0G_SMD-1101588.pdf?src-supplier=Mouser, ComponentLink1URL=http://www.mouser.com/ds/2/212/KEM_C1003_C0G_SMD-1101588.pdf?src-supplier=Mouser, Dimensions="0.5 mm W x 1 mm L x 0.5 mm H", Dissipation Factor DF=0.1, Factory Pack Quantity=10000, Lead Spacing="0.3 mm", Manufacturer Part Number=C0402C101K4GACTU, Packaging=Reel, Part # Aliases=C0402C101K4GAC7867, Pricing 1="1=0.1, 10=0.025, 100=0.0112, 500=0.008, 1000=0.0063, 2500=0.0057, 5000=0.0052 (USD)", Product="General Type MLCCs", Product Category="Multilayer Ceramic Capacitors MLCC - SMD/SMT", RoHS=Details, Series=C0402C, Stock 1=105221, Supplier 1=Digi-Key, Termination Style=SMD/SMT, Type="SMD MLCC C0G 10 - 250 VDC Commercial Grade", Voltage Rating DC="16 V"
C19 C22 C32 C40: "CAP CER 1UF 10V X7R 0603", Capacitance="1 uF", Capacitance - nF="1000 nF", Case Code - in=0603, Case Code - mm=1608, Case Height="0.8 mm", Case Length="1.6 mm", Dielectric=X7R, Manufacturer=KEMET, Maximum Operating Temperature="+ 125 C", Minimum Operating Temperature="- 55 C", Operating Temperature Range="- 55 C to + 125 C", Package / Case="0603 (1608 metric)", Supplier Part Number 1=399-11133-1-ND, Temperature Coefficient / Code="+/- 15 %", Tolerance="10 %", Voltage Rating="10 V", Brand=Kemet, Case Width="0.8 mm", Class="Class 1", ComponentLink1Description=https://www.verical.com/server-webapp/html/getDatasheet?partID=212378&src-supplier=Verical, ComponentLink1URL=https://www.verical.com/server-webapp/html/getDatasheet?partID=212378&src-supplier=Verical, Dimensions="0.8 mm W x 1.6 mm L x 0.8 mm H", Dissipation Factor DF=5, Factory Pack Quantity=4000, Manufacturer Part Number=C0603C105K8RACTU, Packaging=Reel, Part # Aliases=C0603C105K8RAC7867, Pricing 1="1=0.1, 10=0.064, 100=0.0285, 500=0.0204, 1000=0.016 (USD)", Product="General Type MLCCs", Product Category="Multilayer Ceramic Capacitors MLCC - SMD/SMT", RoHS=Details, Series=C0603C, Stock 1=413031, Supplier 1=Digi-Key, Termination Style=SMD/SMT, Type="SMD MLCC X7R 6.3 - 250 VDC Commerical Grade", Voltage Rating DC="10 V"
C21: "CAP CER 180PF 50V X7R 0402", Capacitance="180 pF", Capacitance - nF="0.18 nF", Case Code - in=0402, Case Code - mm=1005, Case Height="0.5 mm", Case Length="1 mm", Dielectric=X7R, Manufacturer=KEMET, Maximum Operating Temperature="+ 125 C", Minimum Operating Temperature="- 55 C", Operating Temperature Range="- 55 C to + 125 C", Package / Case="0402 (1005 metric)", Supplier Part Number 1=399-15305-1-ND, Temperature Coefficient / Code="+/- 15 %", Tolerance="10 %", Voltage Rating="50 V", Brand=Kemet, Case Width="0.5 mm", Class="Class 1", ComponentLink1Description=http://www.farnell.com/datasheets/1807957.pdf?src-supplier=Element14, ComponentLink1URL=http://www.farnell.com/datasheets/1807957.pdf?src-supplier=Element14, ComponentLink2Description=http://www.farnell.com/datasheets/1851736.pdf?src-supplier=Element14, ComponentLink2URL=http://www.farnell.com/datasheets/1851736.pdf?src-supplier=Element14, Dimensions="0.5 mm W x 1 mm L x 0.5 mm H", Dissipation Factor DF=2.5, Factory Pack Quantity=10000, Lead Spacing="0.3 mm", Manufacturer Part Number=C0402C181K5RACTU, Packaging=Reel, Part # Aliases=C0402C181K5RAC7867, Pricing 1="1=0.1, 10=0.068, 100=0.0304, 500=0.0217, 1000=0.0171, 2500=0.0155, 5000=0.0143 (USD)", Product="General Type MLCCs", Product Category="Multilayer Ceramic Capacitors MLCC - SMD/SMT", RoHS=Details, Series=C0402C, Stock 1=45526, Supplier 1=Digi-Key, Termination Style=SMD/SMT, Type="SMD MLCC X7R 6.3 - 250 VDC Commerical Grade", Voltage Rating DC="50 V"
C23 C24: "CAP CER 1UF 6.3V X5R 0402", Capacitance=1µF, Manufacturer=Yageo, Operating Temperature="-55°C ~ 85°C", Package / Case="0402 (1005 Metric)", Ratings=-, Standard Package=1, Supplier Part Number 1=311-1438-1-ND, Temperature Coefficient=X5R, Tolerance=±10%, Voltage - Rated=6.3V, Applications="General Purpose", Catalog Drawings=CC_0402, Category=Capacitors, ComponentLink1Description=http://www.farnell.com/datasheets/70765.pdf?src-supplier=Farnell, ComponentLink1URL=http://www.farnell.com/datasheets/70765.pdf?src-supplier=Farnell, ComponentLink2Description=http://www.yageo.com/documents/recent/UPY-GPHC_X5R_4V-to-50V_25.pdf?src-supplier=Digi-Key, ComponentLink2URL=http://www.yageo.com/documents/recent/UPY-GPHC_X5R_4V-to-50V_25.pdf?src-supplier=Digi-Key, ComponentLink3Description=http://www.farnell.com/datasheets/2167237.pdf?src-supplier=Element14, ComponentLink3URL=http://www.farnell.com/datasheets/2167237.pdf?src-supplier=Element14, ComponentLink4Description=http://www.yageo.com/documents/recent/UPY-GPHC_X5R_4V-to-50V_12.pdf?src-supplier=Avnet+Europe, ComponentLink4URL=http://www.yageo.com/documents/recent/UPY-GPHC_X5R_4V-to-50V_12.pdf?src-supplier=Avnet+Europe, ComponentLink5Description=http://www.farnell.com/datasheets/1359354.pdf?src-supplier=Element14, ComponentLink5URL=http://www.farnell.com/datasheets/1359354.pdf?src-supplier=Element14, ComponentLink6Description=http://www.farnell.com/datasheets/70765.pdf?src-supplier=Element14, ComponentLink6URL=http://www.farnell.com/datasheets/70765.pdf?src-supplier=Element14, ComponentLink7Description=http://www.yageo.com/documents/recent/UPY-GPHC_X5R_4V-to-50V_12.pdf?src-supplier=Avnet, ComponentLink7URL=http://www.yageo.com/documents/recent/UPY-GPHC_X5R_4V-to-50V_12.pdf?src-supplier=Avnet, Family="Ceramic Capacitors", Featured Product="Yageo - High Capacitance MLCC Commodity Multilayer Ceramic Capacitors – CC Series", Features=-, Height - Seated (Max)=-, Lead Spacing=-, Lead Style=-, Manufacturer Part Number=CC0402KRX5R5BB105, Mounting Type="Surface Mount, MLCC", Online Catalog="CC Series", Other Names=311-1438-6, Packaging=Digi-Reel®, Pricing 1="1=0.1, 10=0.052, 100=0.0231, 500=0.0165, 1000=0.013, 2500=0.0118, 5000=0.0109 (USD)", Product Training Modules="Multilayer Ceramic Capacitors", Series=CC, Size / Dimension="0.039\" L x 0.020\" W (1.00mm x 0.50mm)", Stock 1=37230107, Supplier 1=Digi-Key, Thickness (Max)="0.022\" (0.55mm)"
C25: "CAP ALUM POLY 39UF 20% 35V SMD", Capacitance=39µF, ESR (Equivalent Series Resistance)="30 mOhm", Lifetime @ Temp.="5000 Hrs @ 105°C", Manufacturer=Panasonic, Operating Temperature="-55°C ~ 105°C", Package / Case="Radial, Can - SMD", Ripple Current=2.8A, Standard Package=1,000, Supplier Part Number 1=P16561CT-ND, Tolerance=±20%, Voltage Rating=35V, Category=Capacitors, ComponentLink1Description=http://www.mouser.com/ds/2/315/AAB8000C177-947360.pdf?src-supplier=Mouser, ComponentLink1URL=http://www.mouser.com/ds/2/315/AAB8000C177-947360.pdf?src-supplier=Mouser, ComponentLink2Description=http://industrial.panasonic.com/cdbs/www-data/pdf/AAB8000/AAB8000C177.pdf?src-supplier=Element14, ComponentLink2URL=http://industrial.panasonic.com/cdbs/www-data/pdf/AAB8000/AAB8000C177.pdf?src-supplier=Element14, EDA / CAD Models="Download from Accelerated Designs", Family="Aluminum - Polymer Capacitors", Featured Product="OS-CON Capacitors Hot New Technologies", Height - Seated (Max)="0.276\" (7.00mm)", Manufacturer Part Number=35SVPF39M, Mounting Type="Surface Mount", Online Catalog="OS-CON, SVPF Series", Other Names=P16561TR, Packaging="Tape & Reel (TR)", Polarization=Polar, Pricing 1="1=1.51, 10=1.191, 100=0.8935, 500=0.6751 (USD)", Series="OS-CON, SVPF", Size / Dimension="0.315\" Dia (8.00mm)", Stock 1=6908, Supplier 1=Digi-Key, Surface Mount Land Size="0.327\" L x 0.327\" W (8.30mm x 8.30mm)"
C26: "CAP ALUM POLY 120UF 20% 20V SMD", Capacitance=120µF, ESR (Equivalent Series Resistance)="25 mOhm", Lifetime @ Temp.="5000 Hrs @ 105°C", Manufacturer=Panasonic, Operating Temperature="-55°C ~ 105°C", Package / Case="Radial, Can - SMD", Ripple Current=3.2A, Standard Package=1,000, Supplier Part Number 1=P16498CT-ND, Tolerance=±20%, Voltage Rating=20V, Category=Capacitors, ComponentLink1Description=http://industrial.panasonic.com/cdbs/www-data/pdf/AAB8000/AAB8000C177.pdf?src-supplier=Farnell, ComponentLink1URL=http://industrial.panasonic.com/cdbs/www-data/pdf/AAB8000/AAB8000C177.pdf?src-supplier=Farnell, ComponentLink2Description=http://www.alliedelec.com/images/products/datasheets/bm/Panasonic/70324301.pdf?src-supplier=Allied+Electronics, ComponentLink2URL=http://www.alliedelec.com/images/products/datasheets/bm/Panasonic/70324301.pdf?src-supplier=Allied+Electronics, ComponentLink3Description=http://www.farnell.com/datasheets/1734360.pdf?src-supplier=Element14, ComponentLink3URL=http://www.farnell.com/datasheets/1734360.pdf?src-supplier=Element14, EDA / CAD Models="Download from Accelerated Designs", Family="Aluminum - Polymer Capacitors", Featured Product="OS-CON Capacitors Hot New Technologies", Height - Seated (Max)="0.236\" (6.00mm)", Manufacturer Part Number=20SVPF120M, Mounting Type="Surface Mount", Online Catalog="OS-CON, SVPF Series", Other Names=P16498TR, Packaging="Tape & Reel (TR)", Polarization=Polar, Pricing 1="1=1.29, 10=1.022, 100=0.7662, 500=0.5789 (USD)", Series="OS-CON, SVPF", Size / Dimension="0.248\" Dia (6.30mm)", Stock 1=156, Supplier 1=Digi-Key, Surface Mount Land Size="0.260\" L x 0.260\" W (6.60mm x 6.60mm)"
C27 C34 C35: "CAP CER 22UF 25V X5R 1206", Capacitance="22 µF", Case Size/Dimension=1206, Dielectric=X5R, Manufacturer="Kyocera AVX", Rated Voltage="25 V", Supplier Part Number 1=478-9946-1-ND, Tolerance (%)="±10 %", ComponentLink1Description=http://www.avx.com/docs/Catalogs/cx5r.pdf?src-supplier=Future+Electronics, ComponentLink1URL=http://www.avx.com/docs/Catalogs/cx5r.pdf?src-supplier=Future+Electronics, Manufacturer Part Number=12063D226KAT2A, Pricing 1="1=1.15, 10=0.909, 100=0.6814, 500=0.5148, 1000=0.4543 (USD)", Stock 1=100747, Supplier 1=Digi-Key
C29 C39: "CAP CER 0.47UF 6.3V X7R 0603", Capacitance="0.47 uF", Case Code - in=0603, Case Code - mm=1608, Case Height="0.8 mm", Case Length="1.6 mm", Dielectric=X7R, Manufacturer=Murata, Maximum Operating Temperature="+ 125 C", Minimum Operating Temperature="- 55 C", Package / Case="0603 (1608 metric)", Supplier Part Number 1=490-6416-1-ND, Tolerance="10 %", Voltage Rating DC="6.3 VDC", Brand="Murata Electronics", Case Width="0.8 mm", ComponentLink1Description=https://www.murata.com/~/media/webrenewal/support/library/catalog/products/capacitor/mlcc/c02e.ashx?la=en-us&src-supplier=Digi-Key, ComponentLink1URL=https://www.murata.com/~/media/webrenewal/support/library/catalog/products/capacitor/mlcc/c02e.ashx?la=en-us&src-supplier=Digi-Key, ComponentLink2Description=http://psearch.murata.com/capacitor/product/GRM188R70J474KA01%23.pdf?src-supplier=Avnet, ComponentLink2URL=http://psearch.murata.com/capacitor/product/GRM188R70J474KA01%23.pdf?src-supplier=Avnet, Factory Pack Quantity=4000, Manufacturer Part Number=GRM188R70J474KA01D, Packaging=Reel, Pricing 1="1=0.19, 10=0.129, 100=0.0654, 500=0.0447, 1000=0.0396 (USD)", Product="General Type MLCCs", Product Category="Multilayer Ceramic Capacitors MLCC - SMD/SMT", RoHS=Details, Series=GRM, Stock 1=53423, Supplier 1=Digi-Key, Termination Style=SMD/SMT, Type="General Purpose MLCC"
C38: "CAP CER 1UF 50V X7R 1206", Capacitance=1µF, Manufacturer=TDK, Operating Temperature="-55°C ~ 125°C", Package / Case="1206 (3216 Metric)", PCN Part Number="MLCC Part Number Change 30/Nov/2012", Ratings=-, Standard Package=1, Supplier Part Number 1=445-8904-1-ND, Temperature Coefficient=X7R, Tolerance=±10%, Voltage - Rated=50V, Applications="Boardflex Sensitive", Category=Capacitors, ComponentLink1Description=http://www.mouser.com/ds/2/400/tdk_mlcc_commercial_general_en-542463.pdf?src-supplier=Mouser, ComponentLink1URL=http://www.mouser.com/ds/2/400/tdk_mlcc_commercial_general_en-542463.pdf?src-supplier=Mouser, Family="Ceramic Capacitors", Featured Product="Soft Termination MLCC", Features="Soft Termination", Height - Seated (Max)=-, Lead Spacing=-, Lead Style=-, Manufacturer Part Number=C3216X7R1H105K160AE, Mounting Type="Surface Mount, MLCC", Online Catalog="C Series, Soft Termination", Other Names=445-8904-6, Packaging=Digi-Reel®, Pricing 1="1=0.37, 10=0.26, 100=0.1558, 500=0.1168, 1000=0.0987 (USD)", Product Training Modules="SEAT, CCV, and TVCL Design Tools C Series Soft Termination Capacitor Family Guide to Replacing an Electrolytic Capacitor with an MLCC", RoHS Information="RoHS Certificate-MLCC", Series=C, Size / Dimension="0.126\" L x 0.063\" W (3.20mm x 1.60mm)", Stock 1=71650, Supplier 1=Digi-Key, Thickness (Max)="0.063\" (1.60mm)"
C42 C44 C45 C46 C47: "CAP CER 0.1UF 10V X7R 0402", Capacitance=0.1µF, Manufacturer=Yageo, Operating Temperature="-55°C ~ 125°C", Package / Case="0402 (1005 Metric)", Ratings=-, Standard Package=1, Supplier Part Number 1=311-1345-1-ND, Temperature Coefficient=X7R, Tolerance=±10%, Voltage - Rated=10V, Applications="General Purpose", Catalog Drawings=CC_0402, Category=Capacitors, ComponentLink1Description=http://www.mouser.com/ds/2/447/Yageo_UPY-GP_NP0_16V-to-50V_9-358835.pdf?src-supplier=Mouser, ComponentLink1URL=http://www.mouser.com/ds/2/447/Yageo_UPY-GP_NP0_16V-to-50V_9-358835.pdf?src-supplier=Mouser, ComponentLink2Description=https://www.verical.com/server-webapp/html/getDatasheet?partID=317655&src-supplier=Verical, ComponentLink2URL=https://www.verical.com/server-webapp/html/getDatasheet?partID=317655&src-supplier=Verical, ComponentLink3Description=http://www.farnell.com/datasheets/2167236.pdf?src-supplier=Element14, ComponentLink3URL=http://www.farnell.com/datasheets/2167236.pdf?src-supplier=Element14, ComponentLink4Description=http://www.yageo.com/documents/recent/UPY-GPHC_X7R_6.3V-to-50V_18.pdf?src-supplier=Digi-Key, ComponentLink4URL=http://www.yageo.com/documents/recent/UPY-GPHC_X7R_6.3V-to-50V_18.pdf?src-supplier=Digi-Key, ComponentLink5Description=http://www.yageo.com/documents/recent/UPY-GPHC_X7R_6.3V-to-50V_8.pdf?src-supplier=Avnet+Europe, ComponentLink5URL=http://www.yageo.com/documents/recent/UPY-GPHC_X7R_6.3V-to-50V_8.pdf?src-supplier=Avnet+Europe, Family="Ceramic Capacitors", Featured Product="Commodity Multilayer Ceramic Capacitors – CC Series", Features=-, Height - Seated (Max)=-, Lead Spacing=-, Lead Style=-, Manufacturer Part Number=CC0402KRX7R6BB104, Mounting Type="Surface Mount, MLCC", Online Catalog="CC Series", Other Names=311-1345-6, Packaging=Digi-Reel®, Pricing 1="1=0.1, 10=0.03, 100=0.0134, 500=0.0096, 1000=0.0075, 2500=0.0069, 5000=0.0063 (USD)", Product Training Modules="Multilayer Ceramic Capacitors", Series=CC, Size / Dimension="0.039\" L x 0.020\" W (1.00mm x 0.50mm)", Stock 1=1324566, Supplier 1=Digi-Key, Thickness (Max)="0.022\" (0.55mm)"
C48: "CAP CER 10UF 35V X5R 0603", Capacitance=10µF, Manufacturer=Murata, Operating Temperature="-55°C ~ 85°C", Package / Case="0603 (1608 Metric)", Ratings=-, Supplier Part Number 1=490-13248-1-ND, Temperature Coefficient=X5R, Tolerance=±20%, Voltage - Rated=35V, Applications="General Purpose", Category=Capacitors, ComponentLink1Description=http://search.murata.co.jp/Ceramy/image/img/A01X/G101/ENG/GRM188R6YA106MA73-01.pdf?src-supplier=Digi-Key, ComponentLink1URL=http://search.murata.co.jp/Ceramy/image/img/A01X/G101/ENG/GRM188R6YA106MA73-01.pdf?src-supplier=Digi-Key, ComponentLink2Description=http://search.murata.co.jp/Ceramy/image/img/A01X/G101/ENG/GRM188R6YA106MA73-01.pdf?src-supplier=Mouser, ComponentLink2URL=http://search.murata.co.jp/Ceramy/image/img/A01X/G101/ENG/GRM188R6YA106MA73-01.pdf?src-supplier=Mouser, ComponentLink3Description=https://www.murata.com/~/media/webrenewal/support/library/catalog/products/capacitor/mlcc/c02e.ashx?la=en-us&src-supplier=Digi-Key, ComponentLink3URL=https://www.murata.com/~/media/webrenewal/support/library/catalog/products/capacitor/mlcc/c02e.ashx?la=en-us&src-supplier=Digi-Key, ComponentLink4Description=http://search.murata.co.jp/Ceramy/image/img/A01X/G101/ENG/GRM188R6YA106MA73-01.pdf?src-supplier=Future+Electronics, ComponentLink4URL=http://search.murata.co.jp/Ceramy/image/img/A01X/G101/ENG/GRM188R6YA106MA73-01.pdf?src-supplier=Future+Electronics, ComponentLink5Description=http://search.murata.co.jp/Ceramy/image/img/A01X/G101/ENG/GRM188R6YA106MA73-01.pdf?src-supplier=TTI, ComponentLink5URL=http://search.murata.co.jp/Ceramy/image/img/A01X/G101/ENG/GRM188R6YA106MA73-01.pdf?src-supplier=TTI, Family="Ceramic Capacitors", Features="Derating Recommended", Height - Seated (Max)=-, Lead Spacing=-, Lead Style=-, Manufacturer Part Number=GRM188R6YA106MA73D, Mounting Type="Surface Mount, MLCC", Packaging="Tape & Reel (TR)", Pricing 1="1=0.48, 10=0.331, 50=0.2316, 100=0.1986, 500=0.1489, 1000=0.1258 (USD)", Series=GRM, Size / Dimension="0.063\" L x 0.031\" W (1.60mm x 0.80mm)", Stock 1=122766, Supplier 1=Digi-Key, Thickness (Max)="0.039\" (1.00mm)"
C49: "CAP CER 0.047UF 35V X5R 0603", Capacitance=0.047µF, Manufacturer="Taiyo Yuden", Operating Temperature="-55°C ~ 85°C", Package / Case="0603 (1608 Metric)", Ratings=AEC-Q200, Standard Package=1, Supplier Part Number 1=587-3361-1-ND, Temperature Coefficient=X5R, Tolerance=±10%, Voltage - Rated=35V, Applications=Automotive, Category=Capacitors, ComponentLink1Description=https://www.yuden.co.jp/productdata/catalog/mlcc06_hq_e.pdf?src-supplier=Digi-Key, ComponentLink1URL=https://www.yuden.co.jp/productdata/catalog/mlcc06_hq_e.pdf?src-supplier=Digi-Key, ComponentLink2Description=http://ds.yuden.co.jp/TYCOMPAS/ut/detail.do?productNo=GMK107BJ473KAHT&fileName=GMK107BJ473KAHT_SS&mode=specSheetDownload&src-supplier=Digi-Key, ComponentLink2URL=http://ds.yuden.co.jp/TYCOMPAS/ut/detail.do?productNo=GMK107BJ473KAHT&fileName=GMK107BJ473KAHT_SS&mode=specSheetDownload&src-supplier=Digi-Key, Dynamic Catalog="M Series", Family="Ceramic Capacitors", Featured Product="Multilayer Chip Capacitors", Manufacturer Part Number=GMK107BJ473KAHT, Minimum Quantity=0.047µF, Mounting Type="Surface Mount, MLCC", Online Catalog="M Series", Other Names=587-3361-6, Package/Case="0603 (1608 Metric)", Packaging=Digi-Reel®, Pricing 1="1=0.11, 10=0.079, 50=0.0446, 100=0.037, 500=0.0259, 1000=0.0215 (USD)", Quantity Available="Digi-Reel®Alternate Packaging", Series=M, Size / Dimension="0.063\" L x 0.031\" W (1.60mm x 0.80mm)", Stock 1=7209, Supplier 1=Digi-Key, Thickness (Max)="0.035\" (0.90mm)", Unit PriceUSD=M
C50: "CAP CER 0.047UF 10V X7R 0603", Capacitance Value=0.047uF, Dielectric=X7R, Manufacturer=KEMET, Operating Temperature="-55 to 125 °C", Package/Case=0603, Supplier Part Number 1=399-14522-1-ND, Tolerance="10 %", Voltage="10 Vdc", Category="Capacitor Ceramic Multilayer", ComponentLink1Description=https://api.kemet.com/component-edge/download/datasheet/C0603C473K8RACTU.pdf?src-supplier=Digi-Key, ComponentLink1URL=https://api.kemet.com/component-edge/download/datasheet/C0603C473K8RACTU.pdf?src-supplier=Digi-Key, ComponentLink2Description=http://capacitoredge.kemet.com/capedge2/DataSheet?pn=C0603C473K8RACTU&src-supplier=Avnet+Europe, ComponentLink2URL=http://capacitoredge.kemet.com/capedge2/DataSheet?pn=C0603C473K8RACTU&src-supplier=Avnet+Europe, ComponentLink3Description=http://components.arrow.com/part/dataview/0323_00323325?src-supplier=Arrow+Europe, ComponentLink3URL=http://components.arrow.com/part/dataview/0323_00323325?src-supplier=Arrow+Europe, Construction=Flat, Manufacturer Part Number=C0603C473K8RAC7867, Mounting="Surface Mount", Pricing 1="1=0.17, 10=0.118, 100=0.0554, 500=0.0389, 1000=0.0322 (USD)", Product Depth="0.8 mm", Product Height="0.8 mm", Product Length="1.6 mm", Rad Hard=No, Stock 1=19838, Supplier 1=Digi-Key